# Altium PCB BAILEY.PcbDoc (part 3 of 8)
Units mil, origin at the board's own origin, x right, y up, seen from the top; angles counter-clockwise.
Board outline 6100 x 3000 mil, 4 copper layers (Signal Layer 1, Signal Layer 2, Signal Layer 3, Signal Layer 4), stack 59.904 mil thick; 167 components, 96 nets, 718 pads, 2907 vias.
Unrouted connection lines stored in the file: 1.
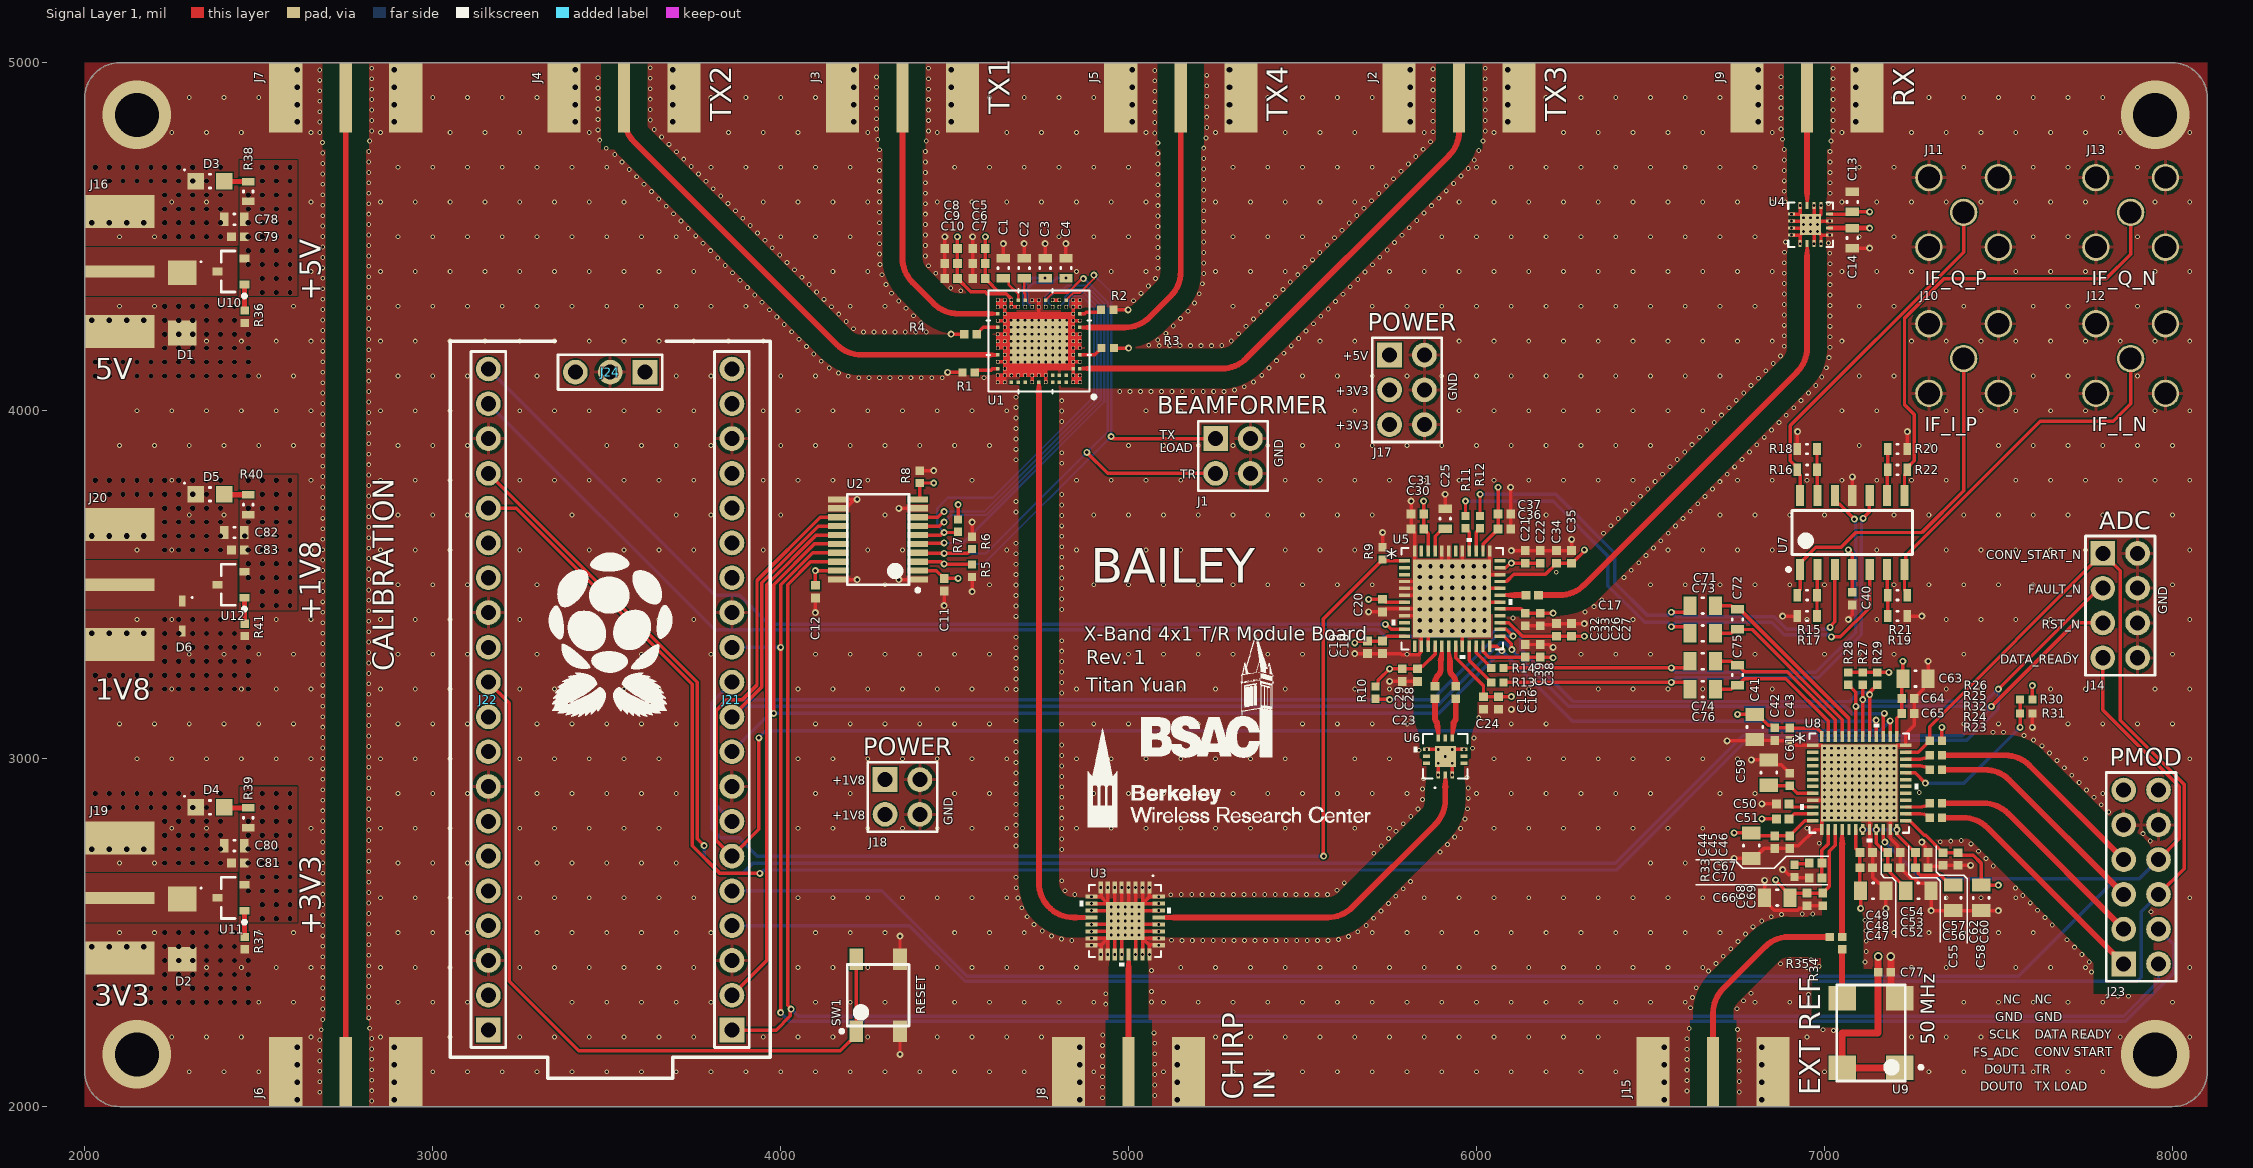
[diagram p0: Signal Layer 1 view]

## Part data (continued)
D6: "ESD protection diodes / TVS diodes; BOURNS; CDSOD323-T03; 19 V; 20 A; 3.3 V; 4 V", Breakdown Voltage="4 V", Clamping Voltage=10.9V, Leakage Current=5µA, Manufacturer="Bourns Inc.", Max Junction Temperature (Tj)=150°C, Max Power Dissipation=350W, Max Surge Current=20A, Maximum Clamping Voltage="19 V", Min Breakdown Voltage=4V, Min Operating Temperature=-55°C, Peak Reverse Current=125µA, Power Line Protection=No, Reverse Standoff Voltage="3.3 V", Supplier Part Number=CDSOD323-T03CT-ND, Test Current=1mA, Working Voltage=3.3V, Category="TVS Diodes", ComponentLink1Description=https://datasheet.octopart.com:443/CDSOD323-T03-Bourns-datasheet-179966062.pdf?src-supplier=IHS, ComponentLink1URL=https://datasheet.octopart.com:443/CDSOD323-T03-Bourns-datasheet-179966062.pdf?src-supplier=IHS, ComponentLink2Description=https://datasheet.octopart.com:443/CDSOD323-T03-Bourns-datasheet-28808730.pdf?src-supplier=Newark, ComponentLink2URL=https://datasheet.octopart.com:443/CDSOD323-T03-Bourns-datasheet-28808730.pdf?src-supplier=Newark, ComponentLink3Description=https://datasheet.octopart.com:443/CDSOD323-T03-Bourns-datasheet-22084022.pdf?src-supplier=Burklin+Elektronik, ComponentLink3URL=https://datasheet.octopart.com:443/CDSOD323-T03-Bourns-datasheet-22084022.pdf?src-supplier=Burklin+Elektronik, ComponentLink4Description=https://datasheet.octopart.com:443/CDSOD323-T03-Bourns-datasheet-13385636.pdf?src-supplier=Electro+Sonic, ComponentLink4URL=https://datasheet.octopart.com:443/CDSOD323-T03-Bourns-datasheet-13385636.pdf?src-supplier=Electro+Sonic, ComponentLink5Description=https://datasheet.octopart.com:443/CDSOD323-T03-Bourns-datasheet-154729637.pdf?src-supplier=RS+(Formerly+Allied+Electronics), ComponentLink5URL=https://datasheet.octopart.com:443/CDSOD323-T03-Bourns-datasheet-154729637.pdf?src-supplier=RS+(Formerly+Allied+Electronics), ComponentLink6Description=https://datasheet.octopart.com:443/CDSOD323-T03-Bourns-datasheet-134530210.pdf?src-supplier=HQonline, ComponentLink6URL=https://datasheet.octopart.com:443/CDSOD323-T03-Bourns-datasheet-134530210.pdf?src-supplier=HQonline, ComponentLink7Description=http://sigma.octopart.com:80/conflict_mineral_statement/Bourns-company-36.pdf?src-supplier=Compliance+Statements, ComponentLink7URL=http://sigma.octopart.com:80/conflict_mineral_statement/Bourns-company-36.pdf?src-supplier=Compliance+Statements, Composition=Zener, Contact Plating=Tin, Country of Origin="Philippines, Uk", Depth=1.45mm, Direction=Unidirectional, Element Configuration=Single, Export Control Classification Number (ECCN) Code=EAR99, Harmonized Tariff Schedule (HTS) Code=8541.10.00.50, Height=1.14mm, Introduction Date=2005-10-06, Length=1.9mm, Lifecycle Status=Production, Manufacturer Part Number=CDSOD323-T03, Max Operating Temperature=150°C, Mounting Technology="Surface Mount", Number of Channels=1, Number of Elements=1, Number of Terminals=2, Number of Unidirectional Channels=1, Peak Pulse Current=20A, Peak Pulse Power=350W, Pins=2, Polarity=Unidirectional, Pricing="1=0.56, 10=0.405, 100=0.312, 500=0.294, 1000=0.28309 (USD)", Radiation Hardening=No, REACH SVHC=Yes, Reverse Breakdown Voltage=4V, RoHS=Compliant, Stock=58965, Supplier=DigiKey, Termination=SMD/SMT, Width=1.45mm
J1 J18: library part CONN_2x2_2.54mm_PinHeader_Vertical, "Pin Header, Board-to-Board, 2.54 mm, 2 Rows, 4 Contacts, Through Hole, TSW Series", Color=Black, Manufacturer=Samtec, Manufacturer Lifecycle Status=PRODUCTION, Manufacturer Part Number=TSW-102-07-F-D, Max Current Rating=7.6A, Max Operating Temperature=125°C, Max Voltage Rating (AC)=550V, Min Operating Temperature=-55°C, Supplier Part Number=SAM10843-ND, Category="Headers and Wire Housings", ComponentLink1Description=https://datasheet.octopart.com:443/TSW-102-07-F-D-Samtec-datasheet-97325576.pdf?src-supplier=Sager+Electronics, ComponentLink1URL=https://datasheet.octopart.com:443/TSW-102-07-F-D-Samtec-datasheet-97325576.pdf?src-supplier=Sager+Electronics, ComponentLink2Description=https://datasheet.octopart.com:443/TSW-102-07-F-D-Samtec-datasheet-151455181.pdf?src-supplier=Sager+Electronics, ComponentLink2URL=https://datasheet.octopart.com:443/TSW-102-07-F-D-Samtec-datasheet-151455181.pdf?src-supplier=Sager+Electronics, ComponentLink3Description=https://sigma.octopart.com:443/97325577/technical_drawing/Samtec-TSW-102-07-F-D.pdf?src-supplier=HQonline, ComponentLink3URL=https://sigma.octopart.com:443/97325577/technical_drawing/Samtec-TSW-102-07-F-D.pdf?src-supplier=HQonline, ComponentLink4Description=https://datasheet.octopart.com:443/TSW-102-07-F-D-Samtec-datasheet-62107121.pdf?src-supplier=Farnell, ComponentLink4URL=https://datasheet.octopart.com:443/TSW-102-07-F-D-Samtec-datasheet-62107121.pdf?src-supplier=Farnell, ComponentLink5Description=https://datasheet.octopart.com:443/TSW-102-07-F-D-Samtec-datasheet-136646178.pdf?src-supplier=Master+Electronics, ComponentLink5URL=https://datasheet.octopart.com:443/TSW-102-07-F-D-Samtec-datasheet-136646178.pdf?src-supplier=Master+Electronics, ComponentLink6Description=https://datasheet.octopart.com:443/TSW-102-07-F-D-Samtec-datasheet-118235302.pdf?src-supplier=Electro+Sonic, ComponentLink6URL=https://datasheet.octopart.com:443/TSW-102-07-F-D-Samtec-datasheet-118235302.pdf?src-supplier=Electro+Sonic, ComponentLink7Description=https://datasheet.octopart.com:443/TSW-102-07-F-D-Samtec-datasheet-180258786.pdf?src-supplier=JRH+Electronics, ComponentLink7URL=https://datasheet.octopart.com:443/TSW-102-07-F-D-Samtec-datasheet-180258786.pdf?src-supplier=JRH+Electronics, ComponentLink8Description=https://datasheet.octopart.com:443/TSW-102-07-F-D-Samtec-datasheet-160657603.pdf?src-supplier=Toby+Electronics, ComponentLink8URL=https://datasheet.octopart.com:443/TSW-102-07-F-D-Samtec-datasheet-160657603.pdf?src-supplier=Toby+Electronics, ComponentLink9Description=https://datasheet.octopart.com:443/TSW-102-07-F-D-Samtec-datasheet-116539033.pdf?src-supplier=Toby+Electronics, ComponentLink9URL=https://datasheet.octopart.com:443/TSW-102-07-F-D-Samtec-datasheet-116539033.pdf?src-supplier=Toby+Electronics, ComponentLink10Description=https://datasheet.octopart.com:443/TSW-102-07-F-D-Samtec-datasheet-116536310.pdf?src-supplier=Toby+Electronics, ComponentLink10URL=https://datasheet.octopart.com:443/TSW-102-07-F-D-Samtec-datasheet-116536310.pdf?src-supplier=Toby+Electronics, ComponentLink11Description=https://datasheet.octopart.com/TSW-102-07-F-D-Samtec-datasheet-86818365.pdf, ComponentLink11URL=https://datasheet.octopart.com/TSW-102-07-F-D-Samtec-datasheet-86818365.pdf, ComponentLink12Description=https://datasheet.octopart.com:443/TSW-102-07-F-D-Samtec-datasheet-11047283.pdf?src-supplier=Newark, ComponentLink12URL=https://datasheet.octopart.com:443/TSW-102-07-F-D-Samtec-datasheet-11047283.pdf?src-supplier=Newark, Connector Type="Male Pin", Contact Material=Bronze, Contact Mating Length=5.842mm, Contact Plating=Gold, Depth=5.08mm, Gender=Male, Housing Color=Black, Housing Material=Polyester, Lead Pitch=2.54mm, Length=5.08mm, Lifecycle Status=Production, Mounting Technology="Through Hole", Number of Contacts=4, Number of Positions=4, Number of Rows=2, Orientation=Straight, Pitch=2.54mm, Pricing="1=0.22, 50=0.19, 100=0.16, 500=0.14, 1000=0.11, 2000=0.1, 5000=0.09, 10000=0.08206 (USD)", Radiation Hardening=No, REACH SVHC=No, RoHS=Compliant, Row Spacing=2.54mm, Stock=11283, Supplier=DigiKey, Termination=Solder
J2 J3 J4 J5 J6 J7 J8 J9 J15 J16 J19 J20: "RF / Coaxial Connector, SMA Coaxial, Straight Jack, Solder, 50 ohm, Beryllium Copper", Case/Package=SMA, Clock Frequency=18GHz, Contact Resistance=4mΩ, Dielectric Material=PTFE, Housing Color=Gold, Insulation Resistance=5GΩ, Manufacturer="Cinch Connectivity Solutions Johnson", Manufacturer Part Number=142-0701-801, Max Operating Temperature=165°C, Maximum Frequency="18 GHz", Min Operating Temperature=-65°C, Supplier Part Number=J502-ND, Voltage Rating=335V, Body Material=Brass, Body Plating=Gold, Category="RF / Coaxial Connectors", ComponentLink1Description=https://datasheet.octopart.com:443/142-0701-801-Cinch-Connectors-datasheet-38159423.pdf?src-supplier=element14+APAC, ComponentLink1URL=https://datasheet.octopart.com:443/142-0701-801-Cinch-Connectors-datasheet-38159423.pdf?src-supplier=element14+APAC, ComponentLink2Description=https://datasheet.octopart.com:443/142-0701-801-Cinch-Connectivity-Solutions-datasheet-128878268.pdf?src-supplier=JRH+Electronics, ComponentLink2URL=https://datasheet.octopart.com:443/142-0701-801-Cinch-Connectivity-Solutions-datasheet-128878268.pdf?src-supplier=JRH+Electronics, ComponentLink3Description=https://datasheet.octopart.com:443/142-0701-801-Cinch-Connectivity-Solutions-datasheet-180501451.pdf?src-supplier=IHS, ComponentLink3URL=https://datasheet.octopart.com:443/142-0701-801-Cinch-Connectivity-Solutions-datasheet-180501451.pdf?src-supplier=IHS, ComponentLink4Description=https://datasheet.octopart.com:443/142-0701-801-Cinch-Connectivity-Solutions-datasheet-182240672.pdf?src-supplier=IHS, ComponentLink4URL=https://datasheet.octopart.com:443/142-0701-801-Cinch-Connectivity-Solutions-datasheet-182240672.pdf?src-supplier=IHS, ComponentLink5Description=https://datasheet.octopart.com:443/142-0701-801-Emerson-datasheet-182246267.pdf?src-supplier=IHS, ComponentLink5URL=https://datasheet.octopart.com:443/142-0701-801-Emerson-datasheet-182246267.pdf?src-supplier=IHS, ComponentLink6Description=https://datasheet.octopart.com:443/142-0701-801-Emerson-Network-Power-datasheet-40124.pdf?src-supplier=Newark, ComponentLink6URL=https://datasheet.octopart.com:443/142-0701-801-Emerson-Network-Power-datasheet-40124.pdf?src-supplier=Newark, ComponentLink7Description=https://datasheet.octopart.com:443/142-0701-801-Cinch-Connectors-datasheet-24914353.pdf?src-supplier=Electro+Sonic, ComponentLink7URL=https://datasheet.octopart.com:443/142-0701-801-Cinch-Connectors-datasheet-24914353.pdf?src-supplier=Electro+Sonic, ComponentLink8Description=https://datasheet.octopart.com:443/142-0701-801-Emerson-Network-Power-datasheet-14433785.pdf?src-supplier=Farnell, ComponentLink8URL=https://datasheet.octopart.com:443/142-0701-801-Emerson-Network-Power-datasheet-14433785.pdf?src-supplier=Farnell, ComponentLink9Description=https://datasheet.octopart.com:443/142-0701-801-Emerson-Network-Power-datasheet-8828422.pdf?src-supplier=Farnell, ComponentLink9URL=https://datasheet.octopart.com:443/142-0701-801-Emerson-Network-Power-datasheet-8828422.pdf?src-supplier=Farnell, ComponentLink10Description=https://datasheet.octopart.com:443/142-0701-801-Emerson-Network-Power-datasheet-10031126.pdf?src-supplier=Farnell, ComponentLink10URL=https://datasheet.octopart.com:443/142-0701-801-Emerson-Network-Power-datasheet-10031126.pdf?src-supplier=Farnell, ComponentLink11Description=https://datasheet.octopart.com:443/142-0701-801-Emerson-Network-Power-datasheet-47159.pdf?src-supplier=Farnell, ComponentLink11URL=https://datasheet.octopart.com:443/142-0701-801-Emerson-Network-Power-datasheet-47159.pdf?src-supplier=Farnell, ComponentLink12Description=https://datasheet.octopart.com:443/142-0701-801-Emerson-Network-Power-datasheet-29036.pdf?src-supplier=Farnell, ComponentLink12URL=https://datasheet.octopart.com:443/142-0701-801-Emerson-Network-Power-datasheet-29036.pdf?src-supplier=Farnell, ComponentLink13Description=https://datasheet.octopart.com:443/142-0701-801-Semflex-datasheet-33021794.pdf?src-supplier=East+Coast+Microwave, ComponentLink13URL=https://datasheet.octopart.com:443/142-0701-801-Semflex-datasheet-33021794.pdf?src-supplier=East+Coast+Microwave, ComponentLink14Description=https://datasheet.octopart.com:443/142-0701-801-Emerson-datasheet-31818286.pdf?src-supplier=East+Coast+Microwave, ComponentLink14URL=https://datasheet.octopart.com:443/142-0701-801-Emerson-datasheet-31818286.pdf?src-supplier=East+Coast+Microwave, ComponentLink15Description=https://datasheet.octopart.com:443/142-0701-801-Cinch-Connectors-datasheet-27682.pdf?src-supplier=RS+(Formerly+Allied+Electronics), ComponentLink15URL=https://datasheet.octopart.com:443/142-0701-801-Cinch-Connectors-datasheet-27682.pdf?src-supplier=RS+(Formerly+Allied+Electronics), ComponentLink16Description=https://datasheet.octopart.com:443/142-0701-801-Emerson-Network-Power-datasheet-644257.pdf?src-supplier=Future+Electronics, ComponentLink16URL=https://datasheet.octopart.com:443/142-0701-801-Emerson-Network-Power-datasheet-644257.pdf?src-supplier=Future+Electronics, ComponentLink17Description=https://datasheet.octopart.com:443/142-0701-801-Emerson-Network-Power-datasheet-55164.pdf?src-supplier=_legacy+Avnet, ComponentLink17URL=https://datasheet.octopart.com:443/142-0701-801-Emerson-Network-Power-datasheet-55164.pdf?src-supplier=_legacy+Avnet, Connector Type="Coaxial, PCB, SMA, Socket", Contact Gender=Female, Contact Material="Gold, Nickel", Contact Plating=Gold, Depth=25.58mm, Export Control Classification Number (ECCN) Code=EAR99, Fastening Type=Threaded, Frequency=18GHz, Gender=Female, Harmonized Tariff Schedule (HTS) Code=8536.69.40.10, Height=9.779mm, Housing Material=Brass, Impedance=50Ω, Insulation Material=PTFE, Introduction Date=1994-06-01, Lead Free="Lead Free", Length=9.52mm, Lifecycle Status=Production, Mounting Technology="Edge, PCB", Number of Contacts=1, Number of Ports=1, Orientation=Straight, Pins=1, Polarity=Normal, Pricing="1=3.73, 10=3.166, 25=2.9676, 50=2.826, 100=2.691, 250=2.52244, 500=2.40206, 1000=2.28748, 2500=2.1444 (USD)", Radiation Hardening=No, REACH SVHC=No, RoHS=Compliant, Schedule B="8536695050, 8536695050|8536695050|8536695050|8536695050|8536695050", Shell Material=Brass, Stock=35108, Supplier=DigiKey, Termination=Solder
J10 J11 J12 J13: "RF / Coaxial Connector, SMA Coaxial, Straight Jack, Through Hole Vertical, 50 ohm", Case/Package=SMA, Clock Frequency=6GHz, Dielectric Material=PTFE, Frequency=20GHz, Housing Color=Gold, Manufacturer=Samtec, Manufacturer Lifecycle Status=PRODUCTION, Manufacturer Part Number=SMA-J-P-H-ST-TH1, Max Operating Temperature=125°C, Maximum Frequency="20 GHz", Min Operating Temperature=-65°C, Supplier Part Number=SAM8971-ND, Voltage Rating=335V, Body Material=Brass, Body Plating=Gold, Category="RF / Coaxial Connectors", ComponentLink1Description=https://datasheet.octopart.com:443/SMA-J-P-H-ST-TH1-Samtec-datasheet-104427088.pdf?src-supplier=Upverter, ComponentLink1URL=https://datasheet.octopart.com:443/SMA-J-P-H-ST-TH1-Samtec-datasheet-104427088.pdf?src-supplier=Upverter, ComponentLink2Description=https://sigma.octopart.com:443/97281565/technical_drawing/Samtec-SMA-J-P-H-ST-TH1.pdf?src-supplier=Upverter, ComponentLink2URL=https://sigma.octopart.com:443/97281565/technical_drawing/Samtec-SMA-J-P-H-ST-TH1.pdf?src-supplier=Upverter, ComponentLink3Description=https://datasheet.octopart.com:443/SMA-J-P-H-ST-TH1-Samtec-datasheet-97281556.pdf?src-supplier=Electro+Sonic, ComponentLink3URL=https://datasheet.octopart.com:443/SMA-J-P-H-ST-TH1-Samtec-datasheet-97281556.pdf?src-supplier=Electro+Sonic, ComponentLink4Description=https://datasheet.octopart.com:443/SMA-J-P-H-ST-TH1-Samtec-datasheet-157420883.pdf?src-supplier=Newark, ComponentLink4URL=https://datasheet.octopart.com:443/SMA-J-P-H-ST-TH1-Samtec-datasheet-157420883.pdf?src-supplier=Newark, ComponentLink5Description=https://datasheet.octopart.com:443/SMA-J-P-H-ST-TH1-Samtec-datasheet-180264035.pdf?src-supplier=JRH+Electronics, ComponentLink5URL=https://datasheet.octopart.com:443/SMA-J-P-H-ST-TH1-Samtec-datasheet-180264035.pdf?src-supplier=JRH+Electronics, ComponentLink6Description=https://datasheet.octopart.com:443/SMA-J-P-H-ST-TH1-Samtec-datasheet-159753816.pdf?src-supplier=Toby+Electronics, ComponentLink6URL=https://datasheet.octopart.com:443/SMA-J-P-H-ST-TH1-Samtec-datasheet-159753816.pdf?src-supplier=Toby+Electronics, ComponentLink7Description=https://datasheet.octopart.com:443/SMA-J-P-H-ST-TH1-Samtec-datasheet-116536392.pdf?src-supplier=Toby+Electronics, ComponentLink7URL=https://datasheet.octopart.com:443/SMA-J-P-H-ST-TH1-Samtec-datasheet-116536392.pdf?src-supplier=Toby+Electronics, ComponentLink8Description=https://datasheet.octopart.com:443/SMA-J-P-H-ST-TH1-Samtec-datasheet-116536236.pdf?src-supplier=Toby+Electronics, ComponentLink8URL=https://datasheet.octopart.com:443/SMA-J-P-H-ST-TH1-Samtec-datasheet-116536236.pdf?src-supplier=Toby+Electronics, Connector Type="SMA, Socket", Contact Material=Gold, Contact Plating=Gold, Depth=7mm, Fastening Type=Threaded, Gender=Female, Height=9.81mm, Impedance=50Ω, Insulation Material=Polytetrafluoroethylene, Length=7mm, Lifecycle Status=Production, Mounting Technology="Flanges, Panel, Through Hole", Number of Contacts=1, Orientation=Straight, Pricing="1=2.75, 10=2.333, 25=2.1864, 50=2.0818, 100=1.9823, 250=1.85816, 500=1.76948, 1000=1.68505, 2500=1.584 (USD)", Radiation Hardening=No, RoHS=Compliant, Stock=25259, Supplier=DigiKey, Termination=Solder
J14: library part CONN_2x4_2.54mm_PinHeader_Vertical, "Pin Header, Board-to-Board, 2.54 mm, 2 Rows, 8 Contacts, Through Hole, TSW Series", Color=Black, Manufacturer=Samtec, Manufacturer Lifecycle Status=PRODUCTION, Manufacturer Part Number=TSW-104-07-F-D, Max Current Rating=7.6A, Max Operating Temperature=125°C, Max Voltage Rating (AC)=550V, Min Operating Temperature=-55°C, Supplier Part Number=SAM8996-ND, Category="Headers and Wire Housings", ComponentLink1Description=https://datasheet.octopart.com:443/TSW-104-07-F-D-Samtec-datasheet-97325576.pdf?src-supplier=Sager+Electronics, ComponentLink1URL=https://datasheet.octopart.com:443/TSW-104-07-F-D-Samtec-datasheet-97325576.pdf?src-supplier=Sager+Electronics, ComponentLink2Description=https://datasheet.octopart.com:443/TSW-104-07-F-D-Samtec-datasheet-151455181.pdf?src-supplier=Sager+Electronics, ComponentLink2URL=https://datasheet.octopart.com:443/TSW-104-07-F-D-Samtec-datasheet-151455181.pdf?src-supplier=Sager+Electronics, ComponentLink3Description=https://sigma.octopart.com:443/97325577/technical_drawing/Samtec-TSW-104-07-F-D.pdf?src-supplier=HQonline, ComponentLink3URL=https://sigma.octopart.com:443/97325577/technical_drawing/Samtec-TSW-104-07-F-D.pdf?src-supplier=HQonline, ComponentLink4Description=https://datasheet.octopart.com:443/TSW-104-07-F-D-Samtec-datasheet-136646178.pdf?src-supplier=Master+Electronics, ComponentLink4URL=https://datasheet.octopart.com:443/TSW-104-07-F-D-Samtec-datasheet-136646178.pdf?src-supplier=Master+Electronics, ComponentLink5Description=https://datasheet.octopart.com:443/TSW-104-07-F-D-Samtec-datasheet-182948906.pdf?src-supplier=JRH+Electronics, ComponentLink5URL=https://datasheet.octopart.com:443/TSW-104-07-F-D-Samtec-datasheet-182948906.pdf?src-supplier=JRH+Electronics, ComponentLink6Description=https://datasheet.octopart.com:443/TSW-104-07-F-D-Samtec-datasheet-160657603.pdf?src-supplier=Toby+Electronics, ComponentLink6URL=https://datasheet.octopart.com:443/TSW-104-07-F-D-Samtec-datasheet-160657603.pdf?src-supplier=Toby+Electronics, ComponentLink7Description=https://datasheet.octopart.com:443/TSW-104-07-F-D-Samtec-datasheet-116539033.pdf?src-supplier=Toby+Electronics, ComponentLink7URL=https://datasheet.octopart.com:443/TSW-104-07-F-D-Samtec-datasheet-116539033.pdf?src-supplier=Toby+Electronics, ComponentLink8Description=https://datasheet.octopart.com:443/TSW-104-07-F-D-Samtec-datasheet-116536310.pdf?src-supplier=Toby+Electronics, ComponentLink8URL=https://datasheet.octopart.com:443/TSW-104-07-F-D-Samtec-datasheet-116536310.pdf?src-supplier=Toby+Electronics, ComponentLink9Description=https://datasheet.octopart.com:443/TSW-104-07-F-D-Samtec-datasheet-116615235.pdf?src-supplier=Electro+Sonic, ComponentLink9URL=https://datasheet.octopart.com:443/TSW-104-07-F-D-Samtec-datasheet-116615235.pdf?src-supplier=Electro+Sonic, ComponentLink10Description=https://datasheet.octopart.com/TSW-104-07-F-D-Samtec-datasheet-86818365.pdf, ComponentLink10URL=https://datasheet.octopart.com/TSW-104-07-F-D-Samtec-datasheet-86818365.pdf, ComponentLink11Description=https://datasheet.octopart.com:443/TSW-104-07-F-D-Samtec-datasheet-62107121.pdf?src-supplier=Newark, ComponentLink11URL=https://datasheet.octopart.com:443/TSW-104-07-F-D-Samtec-datasheet-62107121.pdf?src-supplier=Newark, ComponentLink12Description=https://datasheet.octopart.com:443/TSW-104-07-F-D-Samtec-datasheet-11047283.pdf?src-supplier=Newark, ComponentLink12URL=https://datasheet.octopart.com:443/TSW-104-07-F-D-Samtec-datasheet-11047283.pdf?src-supplier=Newark, Connector Type="Male Pin", Contact Material=Bronze, Contact Mating Length=5.842mm, Contact Plating=Gold, Depth=5.08mm, Gender=Male, Housing Color=Black, Housing Material=Polyester, Lead Pitch=2.54mm, Length=10.16mm, Lifecycle Status=Production, Mounting Technology="Through Hole", Number of Contacts=8, Number of Positions=8, Number of Rows=2, Orientation=Straight, Pitch=2.54mm, Pricing="1=0.43, 50=0.37, 100=0.31, 500=0.26, 1000=0.22, 2000=0.19, 5000=0.17, 10000=0.15 (USD)", Radiation Hardening=No, REACH SVHC=No, RoHS=Compliant, Row Spacing=2.54mm, Stock=18480, Supplier=DigiKey, Termination=Solder
J17: library part CONN_2x3_2.54mm_PinHeader_Vertical, "Pin Header, Board-to-Board, 2.54 mm, 2 Rows, 6 Contacts, Through Hole, TSW Series", Color=Black, Manufacturer=Samtec, Manufacturer Lifecycle Status=PRODUCTION, Manufacturer Part Number=TSW-103-07-F-D, Max Current Rating=7.6A, Max Operating Temperature=125°C, Max Voltage Rating (AC)=550V, Min Operating Temperature=-55°C, Supplier Part Number=SAM10846-ND, Category="Headers and Wire Housings", ComponentLink1Description=https://datasheet.octopart.com:443/TSW-103-07-F-D-Samtec-datasheet-97325576.pdf?src-supplier=Sager+Electronics, ComponentLink1URL=https://datasheet.octopart.com:443/TSW-103-07-F-D-Samtec-datasheet-97325576.pdf?src-supplier=Sager+Electronics, ComponentLink2Description=https://datasheet.octopart.com:443/TSW-103-07-F-D-Samtec-datasheet-151455181.pdf?src-supplier=Sager+Electronics, ComponentLink2URL=https://datasheet.octopart.com:443/TSW-103-07-F-D-Samtec-datasheet-151455181.pdf?src-supplier=Sager+Electronics, ComponentLink3Description=https://sigma.octopart.com:443/97325577/technical_drawing/Samtec-TSW-103-07-F-D.pdf?src-supplier=Samtec, ComponentLink3URL=https://sigma.octopart.com:443/97325577/technical_drawing/Samtec-TSW-103-07-F-D.pdf?src-supplier=Samtec, ComponentLink4Description=https://datasheet.octopart.com:443/TSW-103-07-F-D-Samtec-datasheet-62107121.pdf?src-supplier=Newark, ComponentLink4URL=https://datasheet.octopart.com:443/TSW-103-07-F-D-Samtec-datasheet-62107121.pdf?src-supplier=Newark, ComponentLink5Description=https://datasheet.octopart.com:443/TSW-103-07-F-D-Samtec-datasheet-11047283.pdf?src-supplier=Newark, ComponentLink5URL=https://datasheet.octopart.com:443/TSW-103-07-F-D-Samtec-datasheet-11047283.pdf?src-supplier=Newark, ComponentLink6Description=https://datasheet.octopart.com:443/TSW-103-07-F-D-Samtec-datasheet-136646178.pdf?src-supplier=Master+Electronics, ComponentLink6URL=https://datasheet.octopart.com:443/TSW-103-07-F-D-Samtec-datasheet-136646178.pdf?src-supplier=Master+Electronics, ComponentLink7Description=https://datasheet.octopart.com:443/TSW-103-07-F-D-Samtec-datasheet-116615235.pdf?src-supplier=Electro+Sonic, ComponentLink7URL=https://datasheet.octopart.com:443/TSW-103-07-F-D-Samtec-datasheet-116615235.pdf?src-supplier=Electro+Sonic, ComponentLink8Description=https://datasheet.octopart.com:443/TSW-103-07-F-D-Samtec-datasheet-182948906.pdf?src-supplier=JRH+Electronics, ComponentLink8URL=https://datasheet.octopart.com:443/TSW-103-07-F-D-Samtec-datasheet-182948906.pdf?src-supplier=JRH+Electronics, ComponentLink9Description=https://datasheet.octopart.com:443/TSW-103-07-F-D-Samtec-datasheet-160657603.pdf?src-supplier=Toby+Electronics, ComponentLink9URL=https://datasheet.octopart.com:443/TSW-103-07-F-D-Samtec-datasheet-160657603.pdf?src-supplier=Toby+Electronics, ComponentLink10Description=https://datasheet.octopart.com:443/TSW-103-07-F-D-Samtec-datasheet-116539033.pdf?src-supplier=Toby+Electronics, ComponentLink10URL=https://datasheet.octopart.com:443/TSW-103-07-F-D-Samtec-datasheet-116539033.pdf?src-supplier=Toby+Electronics, ComponentLink11Description=https://datasheet.octopart.com:443/TSW-103-07-F-D-Samtec-datasheet-116536310.pdf?src-supplier=Toby+Electronics, ComponentLink11URL=https://datasheet.octopart.com:443/TSW-103-07-F-D-Samtec-datasheet-116536310.pdf?src-supplier=Toby+Electronics, ComponentLink12Description=https://datasheet.octopart.com/TSW-103-07-F-D-Samtec-datasheet-86818365.pdf, ComponentLink12URL=https://datasheet.octopart.com/TSW-103-07-F-D-Samtec-datasheet-86818365.pdf, Connector Type="Male Pin", Contact Material=Bronze, Contact Mating Length=5.842mm, Contact Plating=Gold, Depth=5.08mm, Gender=Male, Housing Color=Black, Housing Material=Polyester, Lead Pitch=2.54mm, Lifecycle Status=Production, Mounting Technology="Through Hole", Number of Contacts=6, Number of Positions=6, Number of Rows=2, Orientation=Straight, Pins=6, Pitch=2.54mm, Pricing="1=0.32, 250=0.277, 500=0.231, 1000=0.197, 2500=0.164, 5000=0.143, 10000=0.126, 25000=0.1116 (USD)", Radiation Hardening=No, REACH SVHC=No, RoHS=Compliant, Row Spacing=2.54mm, Stock=9841, Supplier=DigiKey, Termination=Solder
J21 J22: library part CONN_1x20_2.54mm_PinSocket_Vertical, "WR-PHD 2.54 mm Socket Header; 20 pins", Contact Resistance=20mΩ, Current Rating=3A, Insulation Resistance=1GΩ, Manufacturer="Wurth Elektronik", Manufacturer Part Number=61302011821, Max Operating Temperature=105°C, Min Operating Temperature=-40°C, Operating Supply Voltage=250V, Supplier Part Number=732-61302011821-ND, Category=Connectors, ComponentLink1Description=https://datasheet.octopart.com:443/61302011821-Wurth-Elektronik-datasheet-182028588.pdf?src-supplier=Wurth+Elektronik, ComponentLink1URL=https://datasheet.octopart.com:443/61302011821-Wurth-Elektronik-datasheet-182028588.pdf?src-supplier=Wurth+Elektronik, ComponentLink2Description=https://datasheet.octopart.com:443/61302011821-W%C3%BCrth-Elektronik-datasheet-62127820.pdf?src-supplier=Wurth+Elektronik, ComponentLink2URL=https://datasheet.octopart.com:443/61302011821-W%C3%BCrth-Elektronik-datasheet-62127820.pdf?src-supplier=Wurth+Elektronik, ComponentLink3Description=https://datasheet.octopart.com:443/61302011821-W%C3%BCrth-Elektronik-datasheet-149524182.pdf?src-supplier=Farnell, ComponentLink3URL=https://datasheet.octopart.com:443/61302011821-W%C3%BCrth-Elektronik-datasheet-149524182.pdf?src-supplier=Farnell, Contact Plating=Gold, Gender=Female, Insulation Material=PBT, Lead Pitch=2.54mm, Length=51.3mm, Orientation=Vertical, Pins=20, Pitch=2.54mm, Pricing="1=0.83, 25=0.7508, 100=0.7038, 250=0.6534, 500=0.6048, 1000=0.5058 (USD)", RoHS=Compliant, Stock=9205, Supplier=DigiKey
J23: library part CONN_2x6_2.54mm_PinHeader_Horizontal, "Conn Unshrouded Header HDR 12 POS 2.54mm Solder RA Top Entry Thru-Hole Bag", Contact Resistance=20mΩ, Current Rating=3A, Insulation Resistance=5GΩ, Manufacturer="Adam Tech", Manufacturer Part Number=PH2RA-12-UA, Max Operating Temperature=105°C, Min Operating Temperature=-40°C, Supplier Part Number=2057-PH2RA-12-UA-ND, Category="Card Edge Connectors", ComponentLink1Description=https://datasheet.octopart.com:443/PH2RA-12-UA-Adam-Tech-datasheet-21182894.pdf?src-supplier=IHS, ComponentLink1URL=https://datasheet.octopart.com:443/PH2RA-12-UA-Adam-Tech-datasheet-21182894.pdf?src-supplier=IHS, ComponentLink2Description=http://sigma.octopart.com:80/reach_statement/Adam-Tech-company-23.pdf?src-supplier=Compliance+Statements, ComponentLink2URL=http://sigma.octopart.com:80/reach_statement/Adam-Tech-company-23.pdf?src-supplier=Compliance+Statements, ComponentLink3Description=http://sigma.octopart.com:80/rohs_statement/Adam-Tech-company-22.pdf?src-supplier=Compliance+Statements, ComponentLink3URL=http://sigma.octopart.com:80/rohs_statement/Adam-Tech-company-22.pdf?src-supplier=Compliance+Statements, Contact Gender=Male, Contact Material=Brass, Export Control Classification Number (ECCN) Code=EAR99, Harmonized Tariff Schedule (HTS) Code=8536.69.40.40, Introduction Date=2012-01-13, Lifecycle Status=Production, Number of Rows=2, Pins=12, Pricing="1=0.27, 10=0.229, 100=0.1945, 500=0.17358, 1000=0.16528, 5000=0.14753, 10000=0.14049 (USD)", REACH SVHC=Yes, RoHS=Compliant, Row Spacing=2.54mm, Schedule B="8536694040, 8536694040|8536694040|8536694040|8536694040|8536694040", Stock=5214, Supplier=DigiKey, Terminal Pitch=2.54mm
J24: library part CONN_1x3_2.54mm_PinSocket_Vertical, "Connector Header Through Hole 3 position 0.100\" (2.54mm)-FAN Control Connector", Contact Resistance=20mΩ, Current Rating=3A, Insulation Resistance=1GΩ, Manufacturer="Wurth Elektronik", Manufacturer Lifecycle Status=ACTIVE, Manufacturer Part Number=61300311821, Max Operating Temperature=105°C, Min Operating Temperature=-40°C, Operating Supply Voltage=250V, Supplier Part Number=732-61300311821-ND, Category=Uncategorized, ComponentLink1Description=https://datasheet.octopart.com:443/61300311821-Wurth-Elektronik-datasheet-182028583.pdf?src-supplier=Wurth+Elektronik, ComponentLink1URL=https://datasheet.octopart.com:443/61300311821-Wurth-Elektronik-datasheet-182028583.pdf?src-supplier=Wurth+Elektronik, ComponentLink2Description=https://datasheet.octopart.com:443/61300311821-W%C3%BCrth-Elektronik-datasheet-62127820.pdf?src-supplier=Wurth+Elektronik, ComponentLink2URL=https://datasheet.octopart.com:443/61300311821-W%C3%BCrth-Elektronik-datasheet-62127820.pdf?src-supplier=Wurth+Elektronik, Contact Plating=Gold, Gender=Female, Insulation Material=PBT, Lead Pitch=2.54mm, Length=8.12mm, Lifecycle Status=Production, Orientation=Vertical, Pins=3, Pitch=2.54mm, Pricing="1=0.32, 10=0.303, 100=0.2916, 250=0.27992, 500=0.2673 (USD)", RoHS=Compliant, Stock=1715, Supplier=DigiKey, YEOL="1 = Estimated lifetime > 10 years"
R1 R2 R3 R4 R11 R12 R13 R14: library part RES, "62.5mW Thin Film Resistor ±50ppm/℃ ±0.1% 50Ω 0402 Chip Resistor - Surface Mount ROHS", Case/Package=0402, Manufacturer=Yageo, Manufacturer Part Number=RT0402BRE0750RL, Max Operating Temperature=155°C, Max Power Dissipation=63mW, Min Operating Temperature=-55°C, Power Dissipation=62.5mW, Power Rating="1/16 W", Supplier Part Number=13-RT0402BRE0750RLCT-ND, Temperature Coefficient=50ppm/°C, Tolerance=+-0.1%, Voltage Rating=50V, Category="Chip SMD Resistors", China RoHS=Non-Compliant, ComponentLink1Description=https://datasheet.octopart.com:443/RT0402BRE0750RL-Yageo-datasheet-169971040.pdf?src-supplier=Upverter, ComponentLink1URL=https://datasheet.octopart.com:443/RT0402BRE0750RL-Yageo-datasheet-169971040.pdf?src-supplier=Upverter, ComponentLink2Description=https://sigma.octopart.com:443/138820526/technical_drawing/Yageo-RT0402BRE0750RL.pdf?src-supplier=Upverter, ComponentLink2URL=https://sigma.octopart.com:443/138820526/technical_drawing/Yageo-RT0402BRE0750RL.pdf?src-supplier=Upverter, ComponentLink3Description=https://datasheet.octopart.com:443/RT0402BRE0750RL-Yageo-datasheet-96443642.pdf?src-supplier=IHS, ComponentLink3URL=https://datasheet.octopart.com:443/RT0402BRE0750RL-Yageo-datasheet-96443642.pdf?src-supplier=IHS, ComponentLink4Description=https://datasheet.octopart.com:443/RT0402BRE0750RL-Yageo-datasheet-176402239.pdf?src-supplier=Future+Electronics, ComponentLink4URL=https://datasheet.octopart.com:443/RT0402BRE0750RL-Yageo-datasheet-176402239.pdf?src-supplier=Future+Electronics, ComponentLink5Description=https://datasheet.octopart.com:443/RT0402BRE0750RL-Yageo-datasheet-166250672.pdf?src-supplier=Future+Electronics, ComponentLink5URL=https://datasheet.octopart.com:443/RT0402BRE0750RL-Yageo-datasheet-166250672.pdf?src-supplier=Future+Electronics, ComponentLink6Description=https://datasheet.octopart.com:443/RT0402BRE0750RL-Yageo-datasheet-141265893.pdf?src-supplier=ODG+(Origin+Data+Global), ComponentLink6URL=https://datasheet.octopart.com:443/RT0402BRE0750RL-Yageo-datasheet-141265893.pdf?src-supplier=ODG+(Origin+Data+Global), ComponentLink7Description=https://datasheet.octopart.com/RT0402BRE0750RL-Yageo-datasheet-86813807.pdf, ComponentLink7URL=https://datasheet.octopart.com/RT0402BRE0750RL-Yageo-datasheet-86813807.pdf, ComponentLink8Description=http://sigma.octopart.com:80/conflict_mineral_statement/Yageo-company-3.pdf?src-supplier=Compliance+Statements, ComponentLink8URL=http://sigma.octopart.com:80/conflict_mineral_statement/Yageo-company-3.pdf?src-supplier=Compliance+Statements, ComponentLink9Description=http://sigma.octopart.com:80/rohs_statement/Yageo-company-2.pdf?src-supplier=Compliance+Statements, ComponentLink9URL=http://sigma.octopart.com:80/rohs_statement/Yageo-company-2.pdf?src-supplier=Compliance+Statements, Composition="Thin Film", Country of Origin="Mainland China", Export Control Classification Number (ECCN) Code=EAR99, Features="Moisture Resistant", Harmonized Tariff Schedule (HTS) Code=8533.21.00.30, Height=350µm, Introduction Date=2017-09-12, Length=990.6µm, Lifecycle Status=Production, Mounting Technology="Surface Mount", Number of Terminals=2, Number of Terminations=2, Package Size=0402, Packaging="Tape & Reel", Pricing="1=0.18, 10=0.076, 25=0.074, 50=0.0714, 100=0.0663, 250=0.05816, 500=0.0561, 1000=0.04564, 10000=0.05508, 20000=0.05304, 30000=0.04099, 50000=0.03992, 70000=0.03927, 100000=0.03862, 120000=0.03831, 240000=0.03778 (USD)", REACH SVHC=Yes, RoHS=Compliant, Stock=104846, Supplier=DigiKey, Width=508µm, Working Voltage=50V
R5 R6 R7: library part RES, "Res General Purpose Thick Film 0402 100K Ohm 1% 1/16W ±100ppm/°C Molded SMD Paper T/R", Case Code (Imperial)=0402, Manufacturer=Yageo, Manufacturer Part Number=RC0402FR-07100KL, Max Operating Temperature=155°C, Max Power Dissipation=63mW, Min Operating Temperature=-55°C, Power Rating="1/16 W", Supplier Part Number=311-100KLRCT-ND, Temperature Coefficient=100ppm/°C, Tolerance=1%, Voltage Rating=50V, Case Code (Metric)=0402, Case/Package=0402, Category="Chip SMD Resistors", China RoHS=Non-Compliant, ComponentLink1Description=https://datasheet.octopart.com:443/RC0402FR-07100KL-Yageo-datasheet-175887523.pdf?src-supplier=Newark, ComponentLink1URL=https://datasheet.octopart.com:443/RC0402FR-07100KL-Yageo-datasheet-175887523.pdf?src-supplier=Newark, ComponentLink2Description=https://datasheet.octopart.com:443/RC0402FR-07100KL-Yageo-datasheet-10408619.pdf?src-supplier=Newark, ComponentLink2URL=https://datasheet.octopart.com:443/RC0402FR-07100KL-Yageo-datasheet-10408619.pdf?src-supplier=Newark, ComponentLink3Description=https://datasheet.octopart.com:443/RC0402FR-07100KL-Yageo-datasheet-8324527.pdf?src-supplier=Newark, ComponentLink3URL=https://datasheet.octopart.com:443/RC0402FR-07100KL-Yageo-datasheet-8324527.pdf?src-supplier=Newark, ComponentLink4Description=https://datasheet.octopart.com:443/RC0402FR-07100KL-Yageo-datasheet-103092701.pdf?src-supplier=Upverter, ComponentLink4URL=https://datasheet.octopart.com:443/RC0402FR-07100KL-Yageo-datasheet-103092701.pdf?src-supplier=Upverter, ComponentLink5Description=https://datasheet.octopart.com:443/RC0402FR-07100KL-Yageo-datasheet-141435361.pdf?src-supplier=Upverter, ComponentLink5URL=https://datasheet.octopart.com:443/RC0402FR-07100KL-Yageo-datasheet-141435361.pdf?src-supplier=Upverter, ComponentLink6Description=https://datasheet.octopart.com:443/RC0402FR-07100KL-Yageo-datasheet-62067350.pdf?src-supplier=Farnell, ComponentLink6URL=https://datasheet.octopart.com:443/RC0402FR-07100KL-Yageo-datasheet-62067350.pdf?src-supplier=Farnell, ComponentLink7Description=https://datasheet.octopart.com:443/RC0402FR-07100KL-Yageo-datasheet-12531192.pdf?src-supplier=Future+Electronics, ComponentLink7URL=https://datasheet.octopart.com:443/RC0402FR-07100KL-Yageo-datasheet-12531192.pdf?src-supplier=Future+Electronics, ComponentLink8Description=https://datasheet.octopart.com:443/RC0402FR-07100KL-Yageo-Group-datasheet-176638170.pdf?src-supplier=Future+Electronics, ComponentLink8URL=https://datasheet.octopart.com:443/RC0402FR-07100KL-Yageo-Group-datasheet-176638170.pdf?src-supplier=Future+Electronics, ComponentLink9Description=https://datasheet.octopart.com:443/RC0402FR-07100KL-Yageo-datasheet-164759695.pdf?src-supplier=Future+Electronics, ComponentLink9URL=https://datasheet.octopart.com:443/RC0402FR-07100KL-Yageo-datasheet-164759695.pdf?src-supplier=Future+Electronics, ComponentLink10Description=https://datasheet.octopart.com:443/RC0402FR-07100KL-Yageo-datasheet-127823281.pdf?src-supplier=Future+Electronics, ComponentLink10URL=https://datasheet.octopart.com:443/RC0402FR-07100KL-Yageo-datasheet-127823281.pdf?src-supplier=Future+Electronics, ComponentLink11Description=https://datasheet.octopart.com:443/RC0402FR-07100KL-Yageo-datasheet-137700087.pdf?src-supplier=Future+Electronics, ComponentLink11URL=https://datasheet.octopart.com:443/RC0402FR-07100KL-Yageo-datasheet-137700087.pdf?src-supplier=Future+Electronics, ComponentLink12Description=https://datasheet.octopart.com:443/RC0402FR-07100KL-Yageo-datasheet-98239111.pdf?src-supplier=Future+Electronics, ComponentLink12URL=https://datasheet.octopart.com:443/RC0402FR-07100KL-Yageo-datasheet-98239111.pdf?src-supplier=Future+Electronics, ComponentLink13Description=https://datasheet.octopart.com:443/RC0402FR-07100KL-Yageo-datasheet-77992522.pdf?src-supplier=Future+Electronics, ComponentLink13URL=https://datasheet.octopart.com:443/RC0402FR-07100KL-Yageo-datasheet-77992522.pdf?src-supplier=Future+Electronics, ComponentLink14Description=https://datasheet.octopart.com:443/RC0402FR-07100KL-Yageo-datasheet-67302840.pdf?src-supplier=Future+Electronics, ComponentLink14URL=https://datasheet.octopart.com:443/RC0402FR-07100KL-Yageo-datasheet-67302840.pdf?src-supplier=Future+Electronics, ComponentLink15Description=https://datasheet.octopart.com:443/RC0402FR-07100KL-Yageo-datasheet-8324255.pdf?src-supplier=Future+Electronics, ComponentLink15URL=https://datasheet.octopart.com:443/RC0402FR-07100KL-Yageo-datasheet-8324255.pdf?src-supplier=Future+Electronics, ComponentLink16Description=https://datasheet.octopart.com:443/RC0402FR-07100KL-Yageo-datasheet-8329306.pdf?src-supplier=element14, ComponentLink16URL=https://datasheet.octopart.com:443/RC0402FR-07100KL-Yageo-datasheet-8329306.pdf?src-supplier=element14, ComponentLink17Description=https://datasheet.octopart.com:443/RC0402FR-07100KL-Yageo-datasheet-175423674.pdf?src-supplier=SOS+electronic, ComponentLink17URL=https://datasheet.octopart.com:443/RC0402FR-07100KL-Yageo-datasheet-175423674.pdf?src-supplier=SOS+electronic, ComponentLink18Description=https://datasheet.octopart.com:443/RC0402FR-07100KL-Yageo-datasheet-148775077.pdf?src-supplier=TME, ComponentLink18URL=https://datasheet.octopart.com:443/RC0402FR-07100KL-Yageo-datasheet-148775077.pdf?src-supplier=TME, ComponentLink19Description=https://datasheet.octopart.com:443/RC0402FR-07100KL-Yageo-datasheet-79472498.pdf?src-supplier=Megastar, ComponentLink19URL=https://datasheet.octopart.com:443/RC0402FR-07100KL-Yageo-datasheet-79472498.pdf?src-supplier=Megastar, ComponentLink20Description=https://datasheet.octopart.com/RC0402FR-07100KL-Yageo-datasheet-73766026.pdf, ComponentLink20URL=https://datasheet.octopart.com/RC0402FR-07100KL-Yageo-datasheet-73766026.pdf, ComponentLink21Description=http://sigma.octopart.com:80/conflict_mineral_statement/Yageo-company-3.pdf?src-supplier=Compliance+Statements, ComponentLink21URL=http://sigma.octopart.com:80/conflict_mineral_statement/Yageo-company-3.pdf?src-supplier=Compliance+Statements, ComponentLink22Description=http://sigma.octopart.com:80/rohs_statement/Yageo-company-2.pdf?src-supplier=Compliance+Statements, ComponentLink22URL=http://sigma.octopart.com:80/rohs_statement/Yageo-company-2.pdf?src-supplier=Compliance+Statements, Composition="Thick Film", Contact Plating=Tin, Depth=500µm, Features="Moisture Resistant", Height=350µm, Lead Free="Lead Free", Length=1mm, Lifecycle Status=Production, Military Standard=Not, Mounting Technology="Surface Mount", Number of Terminals=2, Number of Terminations=2, Package Size=0402, Packaging="Cut Tape (CT)", Pins=2, Pricing="1=0.1, 10=0.021, 25=0.0152, 50=0.012, 100=0.0097, 250=0.0074, 500=0.00612, 1000=0.00512, 5000=0.00355, 10000=0.0031, 20000=0.00275, 30000=0.00257, 50000=0.00239, 70000=0.00228, 100000=0.00218 (USD)", Radiation Hardening=No, REACH SVHC=Yes, RoHS=Compliant, Schedule B="8533210045, 8533210045|8533210045, 8533210045|8533210045|8533210045, 8533210045|8533210045|8533210045|8533210045", Stock=9511413, Supplier=DigiKey, Termination=SMD/SMT, Voltage Rating (AC)=50V, Voltage Rating (DC)=50V, Width=500µm, Working Voltage=50V
R8: library part RES, "Res Thick Film 0402 10K Ohm 1% 0.063W(1/16W) ±100ppm/C Pad SMD T/R", Case Code (Imperial)=0402, Manufacturer=Yageo, Manufacturer Part Number=RC0402FR-0710KL, Max Operating Temperature=155°C, Min Operating Temperature=-55°C, Power Dissipation=62.5mW, Power Rating=63mW, Supplier Part Number=311-10.0KLRCT-ND, Temperature Coefficient=100ppm/°C, Tolerance=1%, Voltage Rating (DC)=50V, Case Code (Metric)=0402, Case/Package=0402, Category="Chip SMD Resistors", China RoHS=Non-Compliant, ComponentLink1Description=https://datasheet.octopart.com:443/RC0402FR-0710KL-Yageo-datasheet-175887523.pdf?src-supplier=Newark, ComponentLink1URL=https://datasheet.octopart.com:443/RC0402FR-0710KL-Yageo-datasheet-175887523.pdf?src-supplier=Newark, ComponentLink2Description=https://datasheet.octopart.com:443/RC0402FR-0710KL-Yageo-datasheet-12531192.pdf?src-supplier=Newark, ComponentLink2URL=https://datasheet.octopart.com:443/RC0402FR-0710KL-Yageo-datasheet-12531192.pdf?src-supplier=Newark, ComponentLink3Description=https://datasheet.octopart.com:443/RC0402FR-0710KL-Yageo-datasheet-8324527.pdf?src-supplier=Newark, ComponentLink3URL=https://datasheet.octopart.com:443/RC0402FR-0710KL-Yageo-datasheet-8324527.pdf?src-supplier=Newark, ComponentLink4Description=https://datasheet.octopart.com:443/RC0402FR-0710KL-Yageo-datasheet-10408619.pdf?src-supplier=element14+APAC, ComponentLink4URL=https://datasheet.octopart.com:443/RC0402FR-0710KL-Yageo-datasheet-10408619.pdf?src-supplier=element14+APAC, ComponentLink5Description=https://datasheet.octopart.com:443/RC0402FR-0710KL-Yageo-datasheet-62067350.pdf?src-supplier=element14+APAC, ComponentLink5URL=https://datasheet.octopart.com:443/RC0402FR-0710KL-Yageo-datasheet-62067350.pdf?src-supplier=element14+APAC, ComponentLink6Description=https://datasheet.octopart.com:443/RC0402FR-0710KL-Yageo-datasheet-21426659.pdf?src-supplier=element14+APAC, ComponentLink6URL=https://datasheet.octopart.com:443/RC0402FR-0710KL-Yageo-datasheet-21426659.pdf?src-supplier=element14+APAC, ComponentLink7Description=https://datasheet.octopart.com:443/RC0402FR-0710KL-Yageo-datasheet-164759695.pdf?src-supplier=Upverter, ComponentLink7URL=https://datasheet.octopart.com:443/RC0402FR-0710KL-Yageo-datasheet-164759695.pdf?src-supplier=Upverter, ComponentLink8Description=https://datasheet.octopart.com:443/RC0402FR-0710KL-Yageo-datasheet-103092701.pdf?src-supplier=Upverter, ComponentLink8URL=https://datasheet.octopart.com:443/RC0402FR-0710KL-Yageo-datasheet-103092701.pdf?src-supplier=Upverter, ComponentLink9Description=https://sigma.octopart.com:443/138820526/technical_drawing/Yageo-RC0402FR-0710KL.pdf?src-supplier=Upverter, ComponentLink9URL=https://sigma.octopart.com:443/138820526/technical_drawing/Yageo-RC0402FR-0710KL.pdf?src-supplier=Upverter, ComponentLink10Description=https://datasheet.octopart.com:443/RC0402FR-0710KL-Yageo-datasheet-98239111.pdf?src-supplier=Upverter, ComponentLink10URL=https://datasheet.octopart.com:443/RC0402FR-0710KL-Yageo-datasheet-98239111.pdf?src-supplier=Upverter, ComponentLink11Description=https://datasheet.octopart.com:443/RC0402FR-0710KL-Yageo-datasheet-68298067.pdf?src-supplier=Upverter, ComponentLink11URL=https://datasheet.octopart.com:443/RC0402FR-0710KL-Yageo-datasheet-68298067.pdf?src-supplier=Upverter, ComponentLink12Description=https://datasheet.octopart.com:443/RC0402FR-0710KL-Yageo-datasheet-68297981.pdf?src-supplier=Upverter, ComponentLink12URL=https://datasheet.octopart.com:443/RC0402FR-0710KL-Yageo-datasheet-68297981.pdf?src-supplier=Upverter, ComponentLink13Description=https://datasheet.octopart.com:443/RC0402FR-0710KL-Yageo-datasheet-141435361.pdf?src-supplier=Upverter, ComponentLink13URL=https://datasheet.octopart.com:443/RC0402FR-0710KL-Yageo-datasheet-141435361.pdf?src-supplier=Upverter, ComponentLink14Description=https://datasheet.octopart.com:443/RC0402FR-0710KL-Yageo-datasheet-12509768.pdf?src-supplier=Upverter, ComponentLink14URL=https://datasheet.octopart.com:443/RC0402FR-0710KL-Yageo-datasheet-12509768.pdf?src-supplier=Upverter, ComponentLink15Description=https://datasheet.octopart.com:443/RC0402FR-0710KL-Yageo-Group-datasheet-190305687.pdf?src-supplier=Future+Electronics, ComponentLink15URL=https://datasheet.octopart.com:443/RC0402FR-0710KL-Yageo-Group-datasheet-190305687.pdf?src-supplier=Future+Electronics, ComponentLink16Description=https://datasheet.octopart.com:443/RC0402FR-0710KL-Yageo-datasheet-137700087.pdf?src-supplier=Future+Electronics, ComponentLink16URL=https://datasheet.octopart.com:443/RC0402FR-0710KL-Yageo-datasheet-137700087.pdf?src-supplier=Future+Electronics, ComponentLink17Description=https://datasheet.octopart.com:443/RC0402FR-0710KL-Yageo-datasheet-8324255.pdf?src-supplier=Future+Electronics, ComponentLink17URL=https://datasheet.octopart.com:443/RC0402FR-0710KL-Yageo-datasheet-8324255.pdf?src-supplier=Future+Electronics, ComponentLink18Description=https://datasheet.octopart.com:443/RC0402FR-0710KL-Yageo-datasheet-8329306.pdf?src-supplier=element14, ComponentLink18URL=https://datasheet.octopart.com:443/RC0402FR-0710KL-Yageo-datasheet-8329306.pdf?src-supplier=element14, ComponentLink19Description=https://datasheet.octopart.com:443/RC0402FR-0710KL-Yageo-datasheet-505231.pdf?src-supplier=element14, ComponentLink19URL=https://datasheet.octopart.com:443/RC0402FR-0710KL-Yageo-datasheet-505231.pdf?src-supplier=element14, ComponentLink20Description=https://datasheet.octopart.com:443/RC0402FR-0710KL-Yageo-datasheet-175423674.pdf?src-supplier=SOS+electronic, ComponentLink20URL=https://datasheet.octopart.com:443/RC0402FR-0710KL-Yageo-datasheet-175423674.pdf?src-supplier=SOS+electronic, ComponentLink21Description=https://datasheet.octopart.com:443/RC0402FR-0710KL-Yageo-datasheet-79472498.pdf?src-supplier=Megastar, ComponentLink21URL=https://datasheet.octopart.com:443/RC0402FR-0710KL-Yageo-datasheet-79472498.pdf?src-supplier=Megastar, ComponentLink22Description=https://datasheet.octopart.com/RC0402FR-0710KL-Yageo-datasheet-73766026.pdf, ComponentLink22URL=https://datasheet.octopart.com/RC0402FR-0710KL-Yageo-datasheet-73766026.pdf, ComponentLink23Description=http://sigma.octopart.com:80/conflict_mineral_statement/Yageo-company-3.pdf?src-supplier=Compliance+Statements, ComponentLink23URL=http://sigma.octopart.com:80/conflict_mineral_statement/Yageo-company-3.pdf?src-supplier=Compliance+Statements, ComponentLink24Description=http://sigma.octopart.com:80/rohs_statement/Yageo-company-2.pdf?src-supplier=Compliance+Statements, ComponentLink24URL=http://sigma.octopart.com:80/rohs_statement/Yageo-company-2.pdf?src-supplier=Compliance+Statements, Composition="Thick Film", Country of Origin="Mainland China, Taiwan", Depth=500µm, Export Control Classification Number (ECCN) Code=EAR99, Harmonized Tariff Schedule (HTS) Code=8533.21.00.30, Height=350µm, Introduction Date=2004-10-04, Lead Free="Lead Free", Lead Pitch=200µm, Length=1mm, Lifecycle Status=Production, Military Standard=Not, Mounting Technology="Surface Mount", Number of Terminals=2, Number of Terminations=2, Package Size=0402, Packaging="Tape & Reel", Pins=2, Pricing="1=0.1, 10=0.012, 25=0.0092, 50=0.0062, 100=0.0056, 250=0.00472, 500=0.00328, 10000=0.00204, 20000=0.00153 (USD)", REACH SVHC=Yes, RoHS=Compliant, Schedule B="8533210045, 8533210045|8533210045|8533210045|8533210045|8533210045|8533210045|8533210045|8533210045|8533210045|8533210045|8533210045|8533210045|8533210045|8533210045, 8533210045|8533210045|8533210045|8533210045|8533210045|8533210045|8533210045|8533210045|8533210045|8533210045|8533210045|8533210045|8533210045|8533210045|8533210045, 8533210045|8533210045|8533210045|8533210045|8533210045|8533210045|8533210045|8533210045|8533210045|8533210045|8533210045|8533210045|8533210045|8533210045|8533210045|8533210045", Stock=9059080, Supplier=DigiKey, Termination=SMD/SMT, Width=500µm, Working Voltage=50V